# Altium PCB carrier_board.PcbDoc (part 14 of 18)
Units mm, origin at the board's own origin, x right, y up, seen from the top; angles counter-clockwise.
Board outline 146 x 102 mm, 20 copper layers (F.Cu, F.Mask, B.Cu, B.Mask, In1.Cu, F.SilkS, In2.Cu, B.SilkS, F.Adhes, B.Adhes, F.Paste, B.Paste, Dwgs.User, Cmts.User, Eco1.User, Eco2.User, Edge.Cuts, Margin, B.CrtYd, F.CrtYd); 256 components, 384 nets, 1262 pads, 1024 vias.
Unrouted connection lines stored in the file: 117.
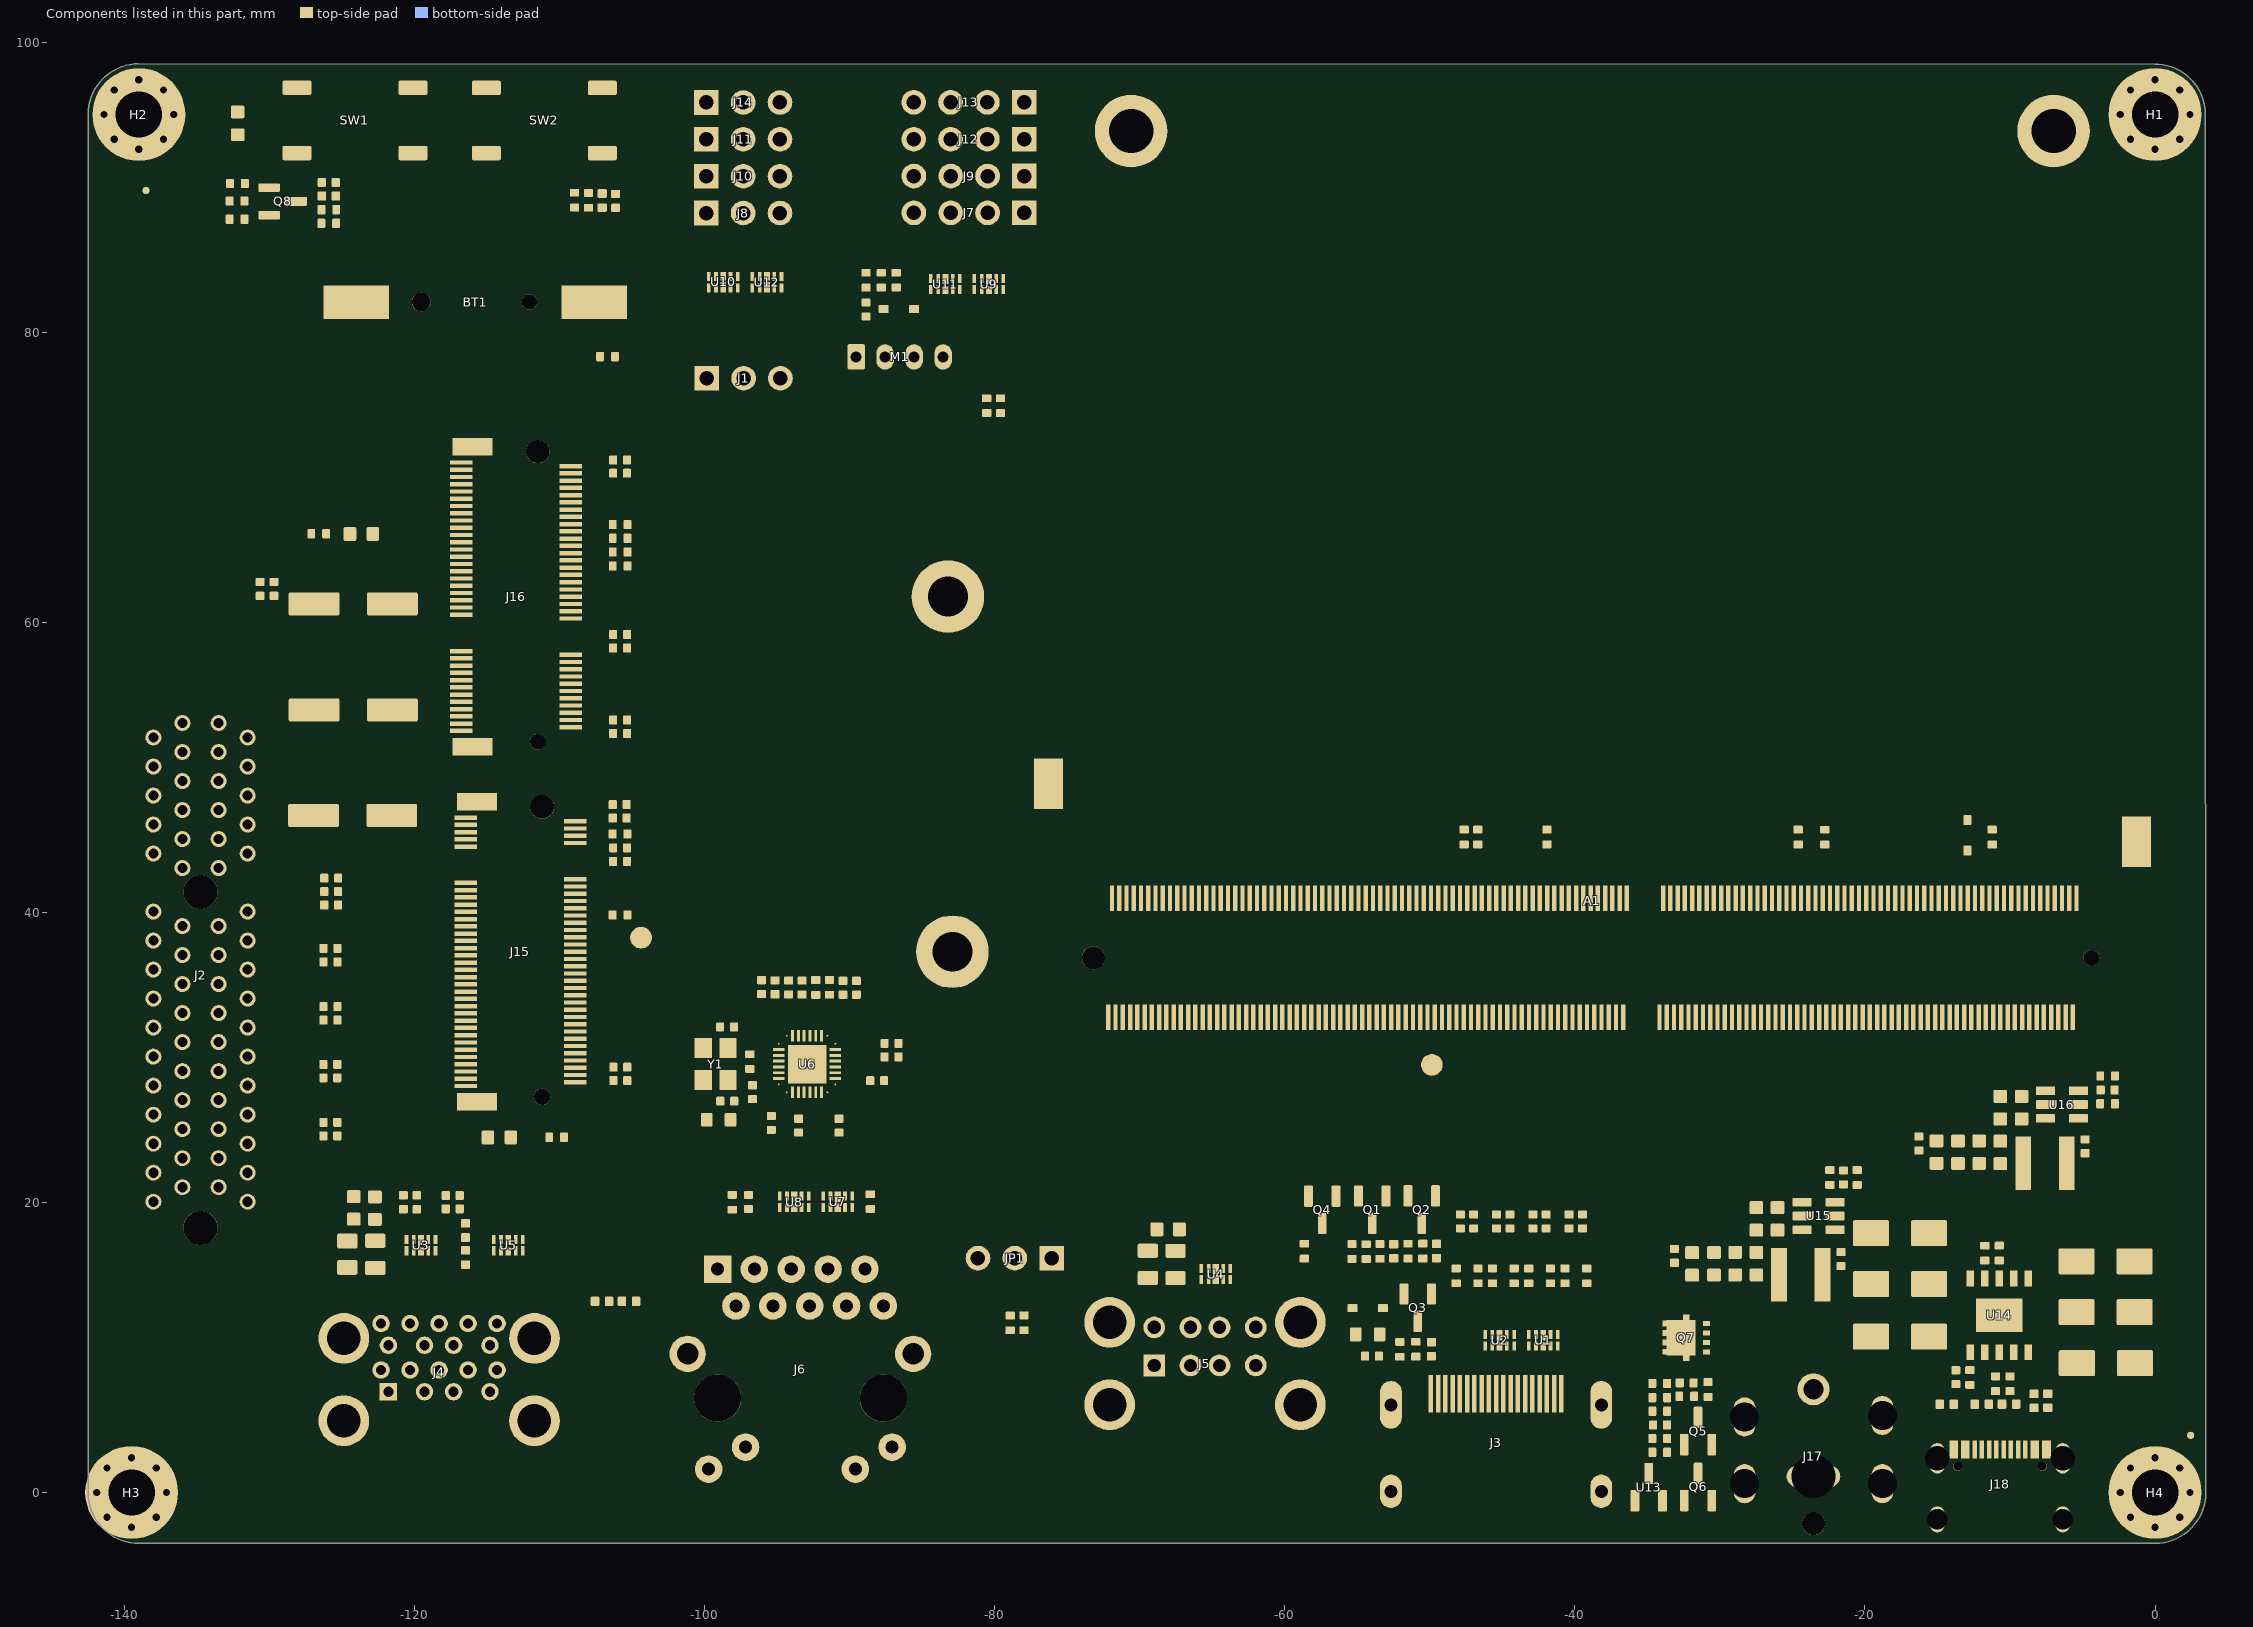
[diagram p24: the components of this part, seen from the top]

## Polygon pours and split planes (outlines as drawn) (continued)
Net-(A1-{\B\I\O\S\_\S\E\L\}\)\ on F.Cu "F.Cu-Net-(A1-~{BIOS_SEL})-1" (solid, remove dead copper, pour order 31634): -41.82,44.14 -41.814,44.21 -41.795,44.293 -41.769,44.353 -41.732,44.402 -41.699,44.427 -41.66,44.441 -41.65,44.443 -41.92,44.681 -42.19,44.443 -42.125,44.416 -42.073,44.357 -42.035,44.259 -42.02,44.14
CON_USB3_D_N on F.Cu "F.Cu-/USB2.0&USB3.0/CON_USB3_D_N-2" (solid, remove dead copper, pour order 31218): 18 vertices, not listed, extent -119.417,6.12 -118.47,7.067
TMDS_CK+ on F.Cu "F.Cu-/HDMI/TMDS_CK+-5" (solid, remove dead copper, pour order 32095): -45.793,11.322 -45.788,11.29 -45.78,11.229 -45.79,11.206 -45.815,11.197 -45.69,10.884 -45.565,11.197 -45.585,11.202 -45.596,11.215 -45.599,11.257 -45.592,11.29 -45.587,11.322
PCIE30_TX2_N on F.Cu "F.Cu-/PCIe x4/PCIE30_TX2_N-1" (solid, remove dead copper, pour order 31200): 21 vertices, not listed, extent -138.001,27.511 -136.984,28.507
CON_USB4_SSTX_P on F.Cu "F.Cu-/USB2.0&USB3.0/CON_USB4_SSTX_P-3" (solid, remove dead copper, pour order 31216): 18 vertices, not listed, extent -122.417,11.533 -121.47,12.48
I2C3_SDA on F.Cu "F.Cu-/GPIO/I2C3_SDA-1" (solid, remove dead copper, pour order 32122): -79.975,83.37 -79.975,83.355 -79.979,83.285 -79.994,83.257 -80.025,83.245 -79.9,82.932 -79.775,83.245 -79.796,83.25 -79.811,83.262 -79.825,83.307 -79.825,83.355 -79.825,83.37
Net-(J15-SUSCLK) on F.Cu "F.Cu-Net-(J15-SUSCLK)-1" (solid, remove dead copper, pour order 31426): -106.711,44.888 -106.642,44.949 -106.551,45.012 -106.473,45.052 -106.392,45.078 -106.334,45.085 -106.278,45.08 -106.339,45.401 -106.61,45.512 -106.622,45.401 -106.674,45.271 -106.768,45.126 -106.852,45.029
MDI3+ on F.Cu "F.Cu-/Gigabit Ethernet/MDI3+-1" (solid, remove dead copper, pour order 32161): -90.537,28.289 -90.627,28.269 -90.718,28.247 -90.818,28.24 -90.986,28.14 -90.585,28.155 -90.584,28.171 -90.574,28.176 -90.551,28.174 -90.537,28.173
GND on F.Cu "F.Cu-GND-121" (solid, remove dead copper, pour order 30999): 19 vertices, not listed, extent -85.581,92.466 -84.246,94.134
CON_USB4_SSTX_P on F.Cu "F.Cu-/USB2.0&USB3.0/CON_USB4_SSTX_P-2" (solid, remove dead copper, pour order 32040): -119.021,17.107 -119.021,17.102 -119.03,17.028 -119.053,16.996 -119.098,16.983 -119.05,16.669 -118.925,16.653 -118.913,16.792 -118.883,16.927 -118.861,17.024 -118.851,17.107
TMDS_D2+ on F.Cu "F.Cu-/HDMI/TMDS_D2+-3" (solid, remove dead copper, pour order 32089): -41.283,10.547 -41.278,10.515 -41.27,10.454 -41.28,10.431 -41.305,10.422 -41.18,10.109 -41.055,10.422 -41.075,10.427 -41.086,10.44 -41.089,10.482 -41.082,10.515 -41.077,10.547
I2C4_SCL on F.Cu "F.Cu-/GPIO/I2C4_SCL-2" (solid, remove dead copper, pour order 31995): -59.677,75.783 -59.722,75.835 -59.749,75.879 -59.775,75.958 -59.795,76.03 -59.844,76.121 -60.011,76.011 -60.121,75.844 -60.011,75.789 -59.958,75.775 -59.878,75.748 -59.834,75.721 -59.783,75.677
VPullup on F.Cu "F.Cu-VPullup-3" (solid, remove dead copper, pour order 31423): -11.742,46.071 -11.681,46.002 -11.618,45.911 -11.578,45.833 -11.552,45.752 -11.545,45.694 -11.55,45.638 -11.229,45.699 -11.118,45.97 -11.229,45.982 -11.359,46.034 -11.504,46.128 -11.601,46.212
SOC_UART2_TX on F.Cu "F.Cu-/GPIO/SOC_UART2_TX-1" (solid, remove dead copper, pour order 31997): -90.887,77.923 -90.932,77.975 -90.959,78.019 -90.985,78.098 -91.005,78.17 -91.054,78.261 -91.221,78.151 -91.331,77.984 -91.221,77.929 -91.168,77.915 -91.088,77.888 -91.044,77.861 -90.993,77.817
GND on F.Cu "F.Cu-GND-120" (solid, remove dead copper, pour order 31742): -115.242,45.483 -115.16,45.482 -115.102,45.472 -115.038,45.449 -114.977,45.426 -114.889,45.404 -114.849,45.6 -114.889,45.796 -115.016,45.756 -115.055,45.736 -115.132,45.701 -115.25,45.683
Net-(J5-VBUS1) on F.Cu "F.Cu-Net-(J5-VBUS1)" (solid, remove dead copper, pour order 31014): 20 vertices, not listed, extent -69.311,8.452 -67.72,10.043
Net-(Q7-G) on F.Cu "F.Cu-Net-(Q7-G)-4" (solid, remove dead copper, pour order 31553): -31.41,7.435 -31.368,7.436 -31.281,7.437 -31.187,7.43 -31.106,7.405 -31.076,7.383 -31.057,7.353 -30.819,7.612 -31.072,7.862 -31.106,7.792 -31.173,7.74 -31.275,7.704 -31.41,7.689
I2C2_SCL on F.Cu "F.Cu-/GPIO/I2C2_SCL-3" (solid, remove dead copper, pour order 32127): -82.325,82.495 -82.325,82.51 -82.321,82.58 -82.306,82.608 -82.275,82.62 -82.4,82.933 -82.525,82.62 -82.504,82.615 -82.489,82.603 -82.475,82.558 -82.475,82.51 -82.475,82.495
HSIO_1_TX+ on F.Cu "F.Cu-/LattePanda Module/HSIO_1_TX+-2" (solid, remove dead copper, pour order 31912): -80.137,20.721 -80.188,20.726 -80.225,20.739 -80.271,20.783 -80.288,20.808 -80.326,20.862 -80.389,20.917 -80.501,20.751 -80.539,20.555 -80.434,20.539 -80.36,20.537 -80.299,20.542 -80.137,20.551
GND on F.Cu "F.Cu-GND-119" (solid, remove dead copper, pour order 31597): -49.232,9.388 -49.333,9.424 -49.453,9.482 -49.524,9.53 -49.579,9.584 -49.608,9.647 -49.886,9.396 -49.656,9.111 -49.614,9.185 -49.546,9.233 -49.455,9.254 -49.373,9.247
GND on F.Cu "F.Cu-GND-118" (solid, remove dead copper, pour order 31650): -117.695,61.91 -117.669,61.912 -117.589,61.911 -117.558,61.895 -117.545,61.86 -116.769,62.01 -117.545,62.16 -117.55,62.137 -117.562,62.121 -117.607,62.107 -117.669,62.108 -117.695,62.11
CON_USB3_SSRX_P on F.Cu "F.Cu-/USB2.0&USB3.0/CON_USB3_SSRX_P-4" (solid, remove dead copper, pour order 32035): -114.501,17.882 -114.501,17.877 -114.51,17.803 -114.533,17.771 -114.578,17.758 -114.53,17.444 -114.405,17.428 -114.393,17.567 -114.363,17.702 -114.341,17.799 -114.331,17.882
GND on F.Cu "F.Cu-GND-117" (solid, remove dead copper, pour order 31873): -63.565,34.384 -63.56,34.46 -63.548,34.515 -63.52,34.581 -63.49,34.646 -63.464,34.741 -63.66,34.781 -63.856,34.741 -63.815,34.605 -63.806,34.584 -63.777,34.505 -63.765,34.384
Net-(J15-DEVSLP) on F.Cu "F.Cu-Net-(J15-DEVSLP)" (solid, remove dead copper, pour order 31661): -107.995,37.38 -108.021,37.378 -108.101,37.379 -108.132,37.395 -108.145,37.43 -108.921,37.28 -108.145,37.13 -108.14,37.153 -108.128,37.169 -108.083,37.183 -108.021,37.182 -107.995,37.18
Net-(J6-PadL1) on F.Cu "F.Cu-Net-(J6-PadL1)" (solid, remove dead copper, pour order 31017): 25 vertices, not listed, extent -87.25,2.945 -85.982,4.213
GND on F.Cu "F.Cu-GND-116" (solid, remove dead copper, pour order 31782): -20.315,41.994 -20.31,42.075 -20.298,42.132 -20.274,42.194 -20.248,42.258 -20.224,42.351 -20.42,42.391 -20.616,42.351 -20.576,42.223 -20.56,42.191 -20.529,42.113 -20.515,41.994
GND on F.Cu "F.Cu-GND-115" (solid, remove dead copper, pour order 31688): -64.95,15.168 -64.937,15.103 -64.923,15.048 -64.918,14.996 -64.932,14.958 -64.949,14.946 -64.975,14.942 -64.75,14.654 -64.525,14.942 -64.553,14.947 -64.571,14.96 -64.582,15.003 -64.563,15.103 -64.55,15.168
{\P\L\T\_\R\S\T\}\ on F.Cu "F.Cu-/~{PLT_RST}-6" (solid, remove dead copper, pour order 32148): -92.41,31.99 -92.407,31.958 -92.405,31.89 -92.414,31.861 -92.435,31.84 -92.335,31.489 -92.235,31.84 -92.261,31.872 -92.265,31.932 -92.263,31.958 -92.26,31.99
GND on F.Cu "F.Cu-GND-114" (solid, remove dead copper, pour order 31724): -49.66,15.946 -49.665,15.85 -49.677,15.784 -49.692,15.735 -49.731,15.589 -49.535,15.549 -49.339,15.589 -49.378,15.735 -49.401,15.82 -49.41,15.946
GND on F.Cu "F.Cu-GND-113" (solid, remove dead copper, pour order 31432): 42 vertices, not listed, extent -81.339,92.8 -80.011,93.8
HSIO_0_TX+ on F.Cu "F.Cu-/LattePanda Module/HSIO_0_TX+" (solid, remove dead copper, pour order 31950): -119.293,21.971 -119.131,21.962 -119.032,21.956 -118.891,21.975 -118.929,22.171 -119.041,22.337 -119.113,22.271 -119.142,22.228 -119.166,22.194 -119.194,22.166 -119.234,22.148 -119.293,22.141
GND on F.Cu "F.Cu-GND-112" (solid, remove dead copper, pour order 31662): -117.395,37.43 -117.369,37.432 -117.289,37.431 -117.258,37.415 -117.245,37.38 -116.469,37.53 -117.245,37.68 -117.25,37.657 -117.262,37.641 -117.307,37.627 -117.369,37.628 -117.395,37.63
+3V3 on F.Cu "F.Cu-+3V3-52" (solid, remove dead copper, pour order 31298): -106.638,45.91 -106.578,45.977 -106.509,46.056 -106.429,46.13 -106.341,46.181 -106.293,46.192 -106.244,46.19 -106.329,46.501 -106.61,46.616 -106.621,46.528 -106.671,46.435 -106.766,46.33 -106.848,46.257 -106.92,46.192
Net-(D22-A) on F.Cu "F.Cu-Net-(D22-A)" (solid, remove dead copper, pour order 31246): 17 vertices, not listed, extent -133.102,94.757 -132.189,95.598
TMDS_D2- on F.Cu "F.Cu-/HDMI/TMDS_D2--4" (solid, remove dead copper, pour order 32082): -41.577,10.448 -41.582,10.48 -41.59,10.541 -41.58,10.564 -41.555,10.572 -41.68,10.886 -41.805,10.572 -41.785,10.568 -41.774,10.555 -41.771,10.513 -41.778,10.48 -41.783,10.448
GND on F.Cu "F.Cu-GND-111" (solid, remove dead copper, pour order 31689): -64.55,14.142 -64.563,14.207 -64.577,14.262 -64.582,14.314 -64.568,14.352 -64.551,14.364 -64.525,14.367 -64.75,14.656 -64.975,14.367 -64.947,14.363 -64.929,14.35 -64.918,14.307 -64.937,14.207 -64.95,14.142
Net-(Q4-G) on F.Cu "F.Cu-Net-(Q4-G)-1" (solid, remove dead copper, pour order 31559): -56.933,20.213 -56.906,20.225 -56.873,20.227 -56.842,20.219 -56.813,20.198 -56.793,20.169 -56.777,20.127 -56.768,20.039 -56.467,20.438 -56.768,20.664 -56.786,20.602 -56.849,20.523 -56.973,20.422 -57.066,20.36 -57.074,20.354
Net-(J3-+5V) on F.Cu "F.Cu-Net-(J3-+5V)-1" (solid, remove dead copper, pour order 31224): -54.355,10.38 -54.382,10.406 -54.497,10.525 -54.613,10.674 -54.661,10.758 -54.696,10.848 -54.714,10.943 -54.71,11.043 -55.111,10.901 -55.238,10.425 -55.145,10.415 -55.046,10.366 -54.933,10.269 -54.804,10.122 -54.715,10.02
Net-(Q4-D) on F.Cu "F.Cu-Net-(Q4-D)-4" (solid, remove dead copper, pour order 31628): -48.288,15.99 -48.294,15.917 -48.314,15.83 -48.34,15.772 -48.377,15.725 -48.409,15.701 -48.449,15.688 -48.455,15.687 -48.185,15.449 -47.915,15.687 -47.98,15.713 -48.031,15.773 -48.067,15.871 -48.082,15.99
TMDS_D1- on F.Cu "F.Cu-/HDMI/TMDS_D1--4" (solid, remove dead copper, pour order 31434): -42.853,14.958 -42.962,14.859 -43.106,14.76 -43.182,14.725 -43.258,14.704 -43.306,14.7 -43.186,14.429 -42.865,14.383 -42.877,14.475 -42.854,14.583 -42.792,14.706 -42.707,14.812
SOC_UART1_RX on F.Cu "F.Cu-/GPIO/SOC_UART1_RX-3" (solid, remove dead copper, pour order 32120): -99.285,83.493 -99.285,83.477 -99.289,83.407 -99.304,83.379 -99.335,83.367 -99.21,83.054 -99.085,83.367 -99.106,83.372 -99.121,83.385 -99.135,83.43 -99.135,83.477 -99.135,83.493
+3V3 on F.Cu "F.Cu-+3V3-51" (solid, remove dead copper, pour order 31401): -89.101,28.766 -89.035,28.692 -88.966,28.596 -88.916,28.508 -88.879,28.414 -88.863,28.345 -88.86,28.276 -88.86,28.273 -88.579,28.389 -88.495,28.7 -88.595,28.7 -88.715,28.738 -88.851,28.817 -88.96,28.907
Net-(U6-CKXTAL2) on F.Cu "F.Cu-Net-(U6-CKXTAL2)-3" (solid, remove dead copper, pour order 31690): -97.463,28.955 -97.38,28.957 -97.199,28.96 -97.119,28.951 -97.065,28.93 -96.879,29.2 -97.186,29.392 -97.206,29.294 -97.26,29.208 -97.345,29.141 -97.395,29.118 -97.442,29.106 -97.463,29.105
VDC on F.Cu "F.Cu-VDC-2" (solid, remove dead copper, pour order 30960): 20 vertices, not listed, extent -16.76,5.64 3.3,41.835
Net-(JP1-C) on F.Cu "F.Cu-Net-(JP1-C)-1" (solid, remove dead copper, pour order 31639): -79.03,12.75 -79.036,12.68 -79.055,12.597 -79.081,12.537 -79.118,12.488 -79.151,12.463 -79.19,12.449 -79.2,12.447 -78.93,12.209 -78.66,12.447 -78.725,12.474 -78.777,12.533 -78.815,12.631 -78.83,12.75
+3V3 on F.Cu "F.Cu-+3V3-50" (solid, remove dead copper, pour order 31416): -106.757,52.635 -106.711,52.588 -106.666,52.527 -106.628,52.458 -106.598,52.379 -106.583,52.307 -106.579,52.231 -106.58,52.21 -106.299,52.33 -106.22,52.64 -106.314,52.642 -106.441,52.682 -106.603,52.771 -106.757,52.885
+5V on F.Cu "F.Cu-+5V-9" (solid, remove dead copper, pour order 31304): -87.342,82.191 -87.411,82.114 -87.485,82.028 -87.571,81.947 -87.667,81.887 -87.719,81.87 -87.774,81.865 -87.661,81.589 -87.31,81.551 -87.312,81.624 -87.277,81.701 -87.197,81.789 -87.124,81.852 -87.059,81.908
GND on F.Cu "F.Cu-GND-110" (solid, remove dead copper, pour order 31848): -95.975,35.364 -95.97,35.442 -95.958,35.498 -95.932,35.563 -95.904,35.627 -95.879,35.721 -96.075,35.761 -96.271,35.721 -96.23,35.589 -96.218,35.563 -96.188,35.484 -96.175,35.364
GND on F.Cu "F.Cu-GND-109" (solid, remove dead copper, pour order 32015): 19 vertices, not listed, extent -49.718,15.062 -49.336,15.549
{\P\L\T\_\R\S\T\}\ on F.Cu "F.Cu-/~{PLT_RST}-5" (solid, remove dead copper, pour order 31686): -110.145,65.16 -110.119,65.162 -110.039,65.161 -110.008,65.145 -109.995,65.11 -109.219,65.26 -109.995,65.41 -110,65.387 -110.012,65.371 -110.057,65.357 -110.119,65.358 -110.145,65.36
CC1 on F.Cu "F.Cu-/PSU/CC1-3" (solid, remove dead copper, pour order 31720): -12.04,3.725 -12.038,3.699 -12.039,3.619 -12.055,3.588 -12.09,3.575 -11.94,2.954 -11.79,3.575 -11.813,3.58 -11.829,3.592 -11.843,3.637 -11.842,3.699 -11.84,3.725
+3V3 on F.Cu "F.Cu-+3V3-49" (solid, remove dead copper, pour order 31568): -109.79,25.08 -109.796,24.995 -109.817,24.894 -109.843,24.829 -109.881,24.773 -109.912,24.745 -109.95,24.727 -109.69,24.489 -109.43,24.727 -109.492,24.766 -109.542,24.841 -109.578,24.957 -109.59,25.08
PCIE30_TX3_N on F.Cu "F.Cu-/PCIe x4/PCIE30_TX3_N" (solid, remove dead copper, pour order 31202): 20 vertices, not listed, extent -138.001,23.511 -136.993,24.507
I2C3_SCL on F.Cu "F.Cu-/GPIO/I2C3_SCL-4" (solid, remove dead copper, pour order 32139): -82.975,84.145 -82.975,84.13 -82.979,84.06 -82.994,84.032 -83.025,84.02 -82.9,83.707 -82.775,84.02 -82.796,84.025 -82.811,84.037 -82.825,84.082 -82.825,84.13 -82.825,84.145
+3V3 on F.Cu "F.Cu-+3V3-48" (solid, remove dead copper, pour order 31841): -131.58,90.694 -131.575,90.772 -131.563,90.828 -131.537,90.893 -131.509,90.957 -131.484,91.051 -131.68,91.091 -131.876,91.051 -131.835,90.919 -131.823,90.893 -131.793,90.814 -131.78,90.694
+3V3 on F.Cu "F.Cu-+3V3-47" (solid, remove dead copper, pour order 31372): -106.5,52.92 -106.495,52.84 -106.488,52.744 -106.492,52.646 -106.518,52.56 -106.544,52.526 -106.58,52.5 -106.3,52.329 -106.02,52.5 -106.074,52.547 -106.104,52.623 -106.112,52.738 -106.105,52.84 -106.1,52.92
GND on F.Cu "F.Cu-GND-108" (solid, remove dead copper, pour order 31853): -117.934,34.63 -118.012,34.635 -118.068,34.647 -118.133,34.673 -118.197,34.701 -118.291,34.726 -118.331,34.53 -118.291,34.334 -118.159,34.375 -118.133,34.387 -118.054,34.417 -117.934,34.43
GND on F.Cu "F.Cu-GND-107" (solid, remove dead copper, pour order 31772): -55.515,39.666 -55.52,39.585 -55.532,39.528 -55.556,39.466 -55.582,39.402 -55.606,39.309 -55.41,39.269 -55.214,39.309 -55.254,39.437 -55.27,39.469 -55.301,39.547 -55.315,39.666
PWR_EN on F.Cu "F.Cu-/PSU/PWR_EN-5" (solid, remove dead copper, pour order 31575): -78.57,11.09 -78.485,11.084 -78.384,11.063 -78.319,11.037 -78.263,10.999 -78.235,10.968 -78.217,10.93 -77.979,11.19 -78.217,11.45 -78.256,11.388 -78.331,11.338 -78.447,11.302 -78.57,11.29
CC1 on F.Cu "F.Cu-/PSU/CC1-2" (solid, remove dead copper, pour order 31849): -9.64,15.404 -9.635,15.482 -9.623,15.538 -9.597,15.603 -9.569,15.667 -9.544,15.761 -9.74,15.801 -9.936,15.761 -9.895,15.629 -9.883,15.603 -9.853,15.524 -9.84,15.404
TMDS_D1+ on F.Cu "F.Cu-/HDMI/TMDS_D1+-4" (solid, remove dead copper, pour order 32091): -42.783,10.547 -42.778,10.515 -42.77,10.454 -42.78,10.431 -42.805,10.422 -42.68,10.109 -42.555,10.422 -42.575,10.427 -42.586,10.44 -42.589,10.482 -42.582,10.515 -42.577,10.547
GND on F.Cu "F.Cu-GND-106" (solid, remove dead copper, pour order 30993): 19 vertices, not listed, extent -86.914,92.466 -85.579,94.134
{\P\W\R\_\L\E\D\}\{\s\l\a\s\h\}\{PSON} on F.Cu "F.Cu-/~{PWR_LED}{slash}~{PSON}-2" (solid, remove dead copper, pour order 31889): -58.75,15.946 -58.755,15.859 -58.767,15.798 -58.787,15.741 -58.831,15.589 -58.635,15.549 -58.439,15.589 -58.478,15.711 -58.5,15.751 -58.535,15.828 -58.55,15.946
CC1 on F.Cu "F.Cu-/PSU/CC1-1" (solid, remove dead copper, pour order 31870): -13.666,5.99 -13.588,5.985 -13.532,5.973 -13.467,5.947 -13.403,5.919 -13.309,5.894 -13.269,6.09 -13.309,6.286 -13.441,6.245 -13.467,6.233 -13.546,6.203 -13.666,6.19
{\C\L\K\R\E\Q\E\}\ on F.Cu "F.Cu-/M.2 E&M Key/~{CLKREQE}-2" (solid, remove dead copper, pour order 31812): -115.476,65.41 -115.398,65.405 -115.342,65.393 -115.277,65.367 -115.213,65.339 -115.119,65.314 -115.079,65.51 -115.119,65.706 -115.251,65.665 -115.277,65.653 -115.356,65.623 -115.476,65.61
Net-(D21-A2) on F.Cu "F.Cu-Net-(D21-A2)-3" (solid, remove dead copper, pour order 31607): -126.345,89.72 -126.325,89.837 -126.298,89.908 -126.259,89.976 -126.219,90.024 -126.171,90.062 -126.12,90.084 -126.387,90.311 -126.657,90.086 -126.599,90.046 -126.547,89.965 -126.508,89.837 -126.495,89.72
GND on F.Cu "F.Cu-GND-105" (solid, remove dead copper, pour order 31778): -51.565,33.794 -51.56,33.875 -51.548,33.932 -51.524,33.994 -51.498,34.058 -51.474,34.151 -51.67,34.191 -51.866,34.151 -51.826,34.023 -51.81,33.991 -51.779,33.913 -51.765,33.794
I2C4_SCL on F.Cu "F.Cu-/GPIO/I2C4_SCL-1" (solid, remove dead copper, pour order 31982): -83.975,82.456 -83.98,82.388 -83.992,82.337 -84.03,82.263 -84.066,82.198 -84.096,82.099 -83.9,82.059 -83.704,82.099 -83.743,82.215 -83.77,82.263 -83.809,82.338 -83.821,82.389 -83.825,82.456
MDI1+ on F.Cu "F.Cu-/Gigabit Ethernet/MDI1+" (solid, remove dead copper, pour order 31029): 24 vertices, not listed, extent -96.085,12.859 -94.505,14.292
GND on F.Cu "F.Cu-GND-104" (solid, remove dead copper, pour order 31336): -48.83,5.355 -48.832,5.381 -48.831,5.461 -48.815,5.492 -48.78,5.505 -48.93,6.806 -49.08,5.505 -49.057,5.5 -49.041,5.488 -49.027,5.443 -49.028,5.381 -49.03,5.355
+3V3 on F.Cu "F.Cu-+3V3-46" (solid, remove dead copper, pour order 31692): -55.26,15.59 -55.254,15.655 -55.235,15.732 -55.209,15.787 -55.172,15.833 -55.138,15.856 -55.097,15.869 -55.09,15.87 -55.36,16.108 -55.63,15.87 -55.562,15.844 -55.51,15.785 -55.473,15.691 -55.46,15.59
GND on F.Cu "F.Cu-GND-103" (solid, remove dead copper, pour order 31392): -96.495,26.56 -96.5,26.626 -96.507,26.709 -96.504,26.791 -96.477,26.86 -96.451,26.883 -96.415,26.897 -96.695,27.121 -96.975,26.897 -96.943,26.886 -96.92,26.867 -96.89,26.81 -96.883,26.716 -96.89,26.626 -96.895,26.56
+3V3 on F.Cu "F.Cu-+3V3-45" (solid, remove dead copper, pour order 31476): -106.425,70.86 -106.438,70.694 -106.464,70.603 -106.511,70.53 -106.569,70.494 -106.3,70.269 -106.031,70.494 -106.091,70.532 -106.136,70.605 -106.166,70.718 -106.175,70.86
HSIO_2_RX+ on F.Cu "F.Cu-/LattePanda Module/HSIO_2_RX+" (solid, remove dead copper, pour order 31965): -98.387,42.729 -98.549,42.738 -98.648,42.744 -98.789,42.725 -98.751,42.529 -98.639,42.363 -98.567,42.429 -98.538,42.472 -98.514,42.506 -98.486,42.534 -98.446,42.552 -98.387,42.559
SOC_UART0_RX on F.Cu "F.Cu-/GPIO/SOC_UART0_RX-2" (solid, remove dead copper, pour order 32131): -99.785,83.493 -99.785,83.477 -99.789,83.407 -99.804,83.379 -99.835,83.367 -99.71,83.054 -99.585,83.367 -99.606,83.372 -99.621,83.385 -99.635,83.43 -99.635,83.477 -99.635,83.493
GND on F.Cu "F.Cu-GND-102" (solid, remove dead copper, pour order 31711): -83.25,84.684 -83.245,84.861 -83.216,85.029 -83.214,85.041 -83.41,85.081 -83.606,85.041 -83.577,84.915 -83.557,84.82 -83.55,84.684
+3V3 on F.Cu "F.Cu-+3V3-44" (solid, remove dead copper, pour order 31475): -106.175,70.6 -106.162,70.766 -106.136,70.857 -106.089,70.93 -106.031,70.966 -106.3,71.191 -106.569,70.966 -106.509,70.928 -106.464,70.855 -106.434,70.742 -106.425,70.6
GbE_PCIe_CLK- on F.Cu "F.Cu-/Gigabit Ethernet/GbE_PCIe_CLK--1" (solid, remove dead copper, pour order 31938): -48.662,42.865 -48.695,42.904 -48.711,42.94 -48.713,43.003 -48.707,43.033 -48.696,43.098 -48.702,43.181 -48.898,43.143 -49.064,43.031 -49.001,42.946 -48.95,42.892 -48.904,42.853 -48.783,42.745
GND on F.Cu "F.Cu-GND-101" (solid, remove dead copper, pour order 31792): -44.815,41.994 -44.81,42.075 -44.798,42.132 -44.774,42.194 -44.748,42.258 -44.724,42.351 -44.92,42.391 -45.116,42.351 -45.076,42.223 -45.06,42.191 -45.029,42.113 -45.015,41.994
PCIE30_TX1_P on F.Cu "F.Cu-/PCIe x4/PCIE30_TX1_P-1" (solid, remove dead copper, pour order 31529): -126.773,33.086 -126.591,33.15 -126.482,33.178 -126.373,33.196 -126.298,33.199 -126.232,33.19 -126.269,33.5 -126.55,33.651 -126.563,33.528 -126.611,33.41 -126.691,33.311 -126.773,33.256
GND on F.Cu "F.Cu-GND-100" (solid, remove dead copper, pour order 31794): -30.815,41.994 -30.81,42.075 -30.798,42.132 -30.774,42.194 -30.748,42.258 -30.724,42.351 -30.92,42.391 -31.116,42.351 -31.076,42.223 -31.06,42.191 -31.029,42.113 -31.015,41.994
DDC_SCL on F.Cu "F.Cu-/HDMI/DDC_SCL-3" (solid, remove dead copper, pour order 31413): -48.939,16.9 -48.964,16.925 -49.126,17.1 -49.193,17.199 -49.212,17.247 -49.22,17.293 -49.539,17.137 -49.617,16.841 -49.499,16.879 -49.368,16.882 -49.231,16.85 -49.111,16.786 -49.08,16.759
TMDS_CK+ on F.Cu "F.Cu-/HDMI/TMDS_CK+-4" (solid, remove dead copper, pour order 31437): -47.017,13.902 -46.908,14.001 -46.764,14.1 -46.688,14.135 -46.612,14.156 -46.564,14.16 -46.684,14.431 -47.005,14.477 -46.993,14.385 -47.016,14.277 -47.078,14.154 -47.163,14.048
CON_USB1_D_N on F.Cu "F.Cu-/USB2.0&USB3.0/CON_USB1_D_N-1" (solid, remove dead copper, pour order 32041): -64.221,15.893 -64.221,15.887 -64.23,15.813 -64.253,15.781 -64.298,15.767 -64.25,15.454 -64.125,15.438 -64.113,15.577 -64.083,15.712 -64.061,15.809 -64.051,15.893
DDI_B_TX2- on F.Cu "F.Cu-/HDMI/DDI_B_TX2-" (solid, remove dead copper, pour order 31465): -45.198,19.683 -45.245,19.595 -45.286,19.55 -45.338,19.51 -45.394,19.48 -45.458,19.459 -45.56,19.45 -45.402,19.169 -45.092,19.142 -45.1,19.243 -45.076,19.399 -45.015,19.612 -44.993,19.683
CON_USB4_SSRX_N on F.Cu "F.Cu-/USB2.0&USB3.0/CON_USB4_SSRX_N-4" (solid, remove dead copper, pour order 32059): -112.729,17.882 -112.713,17.769 -112.697,17.702 -112.667,17.567 -112.655,17.428 -112.53,17.444 -112.482,17.758 -112.511,17.762 -112.532,17.775 -112.554,17.817 -112.559,17.877 -112.559,17.882
GbE_PCIe_RX+ on F.Cu "F.Cu-/Gigabit Ethernet/GbE_PCIe_RX+" (solid, remove dead copper, pour order 31955): -80.339,44.983 -80.348,44.821 -80.354,44.722 -80.335,44.581 -80.139,44.619 -79.973,44.731 -80.039,44.803 -80.082,44.832 -80.116,44.856 -80.144,44.884 -80.162,44.924 -80.169,44.983
HSIO_3_RX- on F.Cu "F.Cu-/LattePanda Module/HSIO_3_RX--2" (solid, remove dead copper, pour order 31949): -77.203,56.411 -77.041,56.402 -76.942,56.396 -76.801,56.415 -76.839,56.611 -76.951,56.777 -77.023,56.711 -77.052,56.668 -77.076,56.634 -77.104,56.606 -77.144,56.588 -77.203,56.581
MDI2+ on F.Cu "F.Cu-/Gigabit Ethernet/MDI2+" (solid, remove dead copper, pour order 31032): 24 vertices, not listed, extent -93.545,12.859 -91.965,14.292
TMDS_D0+ on F.Cu "F.Cu-/HDMI/TMDS_D0+-5" (solid, remove dead copper, pour order 32088): -44.293,10.547 -44.288,10.515 -44.28,10.454 -44.29,10.431 -44.315,10.422 -44.19,10.109 -44.065,10.422 -44.085,10.427 -44.096,10.44 -44.099,10.482 -44.092,10.515 -44.087,10.547
Net-(A1-SIO_UART_TX) on F.Cu "F.Cu-Net-(A1-SIO_UART_TX)" (solid, remove dead copper, pour order 31854): -72.864,44.67 -72.942,44.675 -72.998,44.687 -73.063,44.713 -73.127,44.741 -73.221,44.766 -73.261,44.57 -73.221,44.374 -73.089,44.415 -73.063,44.427 -72.984,44.457 -72.864,44.47
CON_USB4_SSTX_N on F.Cu "F.Cu-/USB2.0&USB3.0/CON_USB4_SSTX_N-2" (solid, remove dead copper, pour order 31535): -118.345,19.799 -118.263,19.747 -118.22,19.702 -118.181,19.646 -118.151,19.585 -118.13,19.516 -118.12,19.407 -117.839,19.56 -117.804,19.87 -117.911,19.861 -118.071,19.884 -118.284,19.947 -118.345,19.969
Net-(D11-A2) on F.Cu "F.Cu-Net-(D11-A2)" (solid, remove dead copper, pour order 31428): -10.455,5.475 -10.45,5.552 -10.431,5.643 -10.405,5.72 -10.367,5.788 -10.332,5.826 -10.29,5.854 -10.271,5.861 -10.555,6.091 -10.839,5.861 -10.772,5.821 -10.716,5.743 -10.674,5.624 -10.655,5.475
GND on F.Cu "F.Cu-GND-99" (solid, remove dead copper, pour order 31430): 42 vertices, not listed, extent -95.639,92.79 -94.311,93.79
GND on F.Cu "F.Cu-GND-98" (solid, remove dead copper, pour order 31883): -100.704,29.096 -100.75,29.148 -100.778,29.193 -100.804,29.27 -100.825,29.341 -100.874,29.431 -101.041,29.321 -101.151,29.154 -101.017,29.078 -100.941,29.036 -100.846,28.954
Net-(Q5-G) on F.Cu "F.Cu-Net-(Q5-G)-2" (solid, remove dead copper, pour order 31286): -32.762,4.162 -32.698,4.071 -32.657,3.943 -32.646,3.772 -32.673,3.559 -32.746,3.308 -32.76,3.272 -32.459,3.302 -32.317,4.04 -32.358,4.058 -32.426,4.132 -32.492,4.224 -32.582,4.342
Net-(Q5-S) on F.Cu "F.Cu-Net-(Q5-S)-1" (solid, remove dead copper, pour order 31288): -30.493,2.196 -30.471,2.345 -30.442,2.44 -30.402,2.529 -30.364,2.587 -30.319,2.632 -30.271,2.658 -30.559,3.303 -30.816,2.609 -30.746,2.579 -30.688,2.514 -30.646,2.417 -30.634,2.337
GND on F.Cu "F.Cu-GND-97" (solid, remove dead copper, pour order 31677): -117.395,28.43 -117.369,28.432 -117.289,28.431 -117.258,28.415 -117.245,28.38 -116.469,28.53 -117.245,28.68 -117.25,28.657 -117.262,28.641 -117.307,28.627 -117.369,28.628 -117.395,28.63
GND on F.Cu "F.Cu-GND-96" (solid, remove dead copper, pour order 31671): -115.845,63.61 -115.871,63.608 -115.951,63.609 -115.982,63.625 -115.995,63.66 -116.771,63.51 -115.995,63.36 -115.99,63.383 -115.978,63.399 -115.933,63.413 -115.871,63.412 -115.845,63.41
GND on F.Cu "F.Cu-GND-95" (solid, remove dead copper, pour order 31140): 19 vertices, not listed, extent -101.109,28.17 -99.969,29.359
GND on F.Cu "F.Cu-GND-94" (solid, remove dead copper, pour order 31164): 19 vertices, not listed, extent -116.489,51.409 -115.266,52.51
+12V on F.Cu "F.Cu-+12V-3" (solid, remove dead copper, pour order 31590): -33.33,7.462 -33.259,7.457 -33.175,7.438 -33.108,7.412 -33.049,7.375 -33.018,7.341 -32.997,7.3 -32.993,7.283 -32.769,7.562 -32.993,7.842 -33.025,7.776 -33.092,7.721 -33.198,7.68 -33.33,7.662
+1V0 on F.Cu "F.Cu-+1V0-8" (solid, remove dead copper, pour order 31696): -90.949,26.2 -90.932,26.164 -90.922,26.117 -90.924,26.074 -90.939,26.031 -90.962,26.003 -90.996,25.979 -91.034,25.964 -90.734,25.769 -90.521,26.041 -90.58,26.062 -90.656,26.129 -90.753,26.257 -90.791,26.315 -90.808,26.341
Net-(A1-{\B\I\O\S\_\S\E\L\}\)\ on F.Cu "F.Cu-Net-(A1-~{BIOS_SEL})" (solid, remove dead copper, pour order 31808): -42.02,43.266 -42.025,43.188 -42.037,43.132 -42.063,43.067 -42.091,43.003 -42.116,42.909 -41.92,42.869 -41.724,42.909 -41.765,43.041 -41.777,43.067 -41.807,43.146 -41.82,43.266
GND on F.Cu "F.Cu-GND-93" (solid, remove dead copper, pour order 31877): -60.324,34.154 -60.268,34.204 -60.221,34.234 -60.152,34.26 -60.086,34.285 -59.999,34.334 -60.109,34.501 -60.276,34.611 -60.344,34.485 -60.352,34.466 -60.388,34.39 -60.466,34.296
TMDS_D0- on F.Cu "F.Cu-/HDMI/TMDS_D0--5" (solid, remove dead copper, pour order 31320): -45.033,8.255 -45.031,8.227 -45.031,8.148 -45.046,8.117 -45.08,8.105 -44.93,6.804 -44.78,8.105 -44.803,8.11 -44.819,8.122 -44.832,8.167 -44.829,8.227 -44.827,8.255
+3V3 on F.Cu "F.Cu-+3V3-43" (solid, remove dead copper, pour order 31622): -108.295,53.385 -108.335,53.378 -108.408,53.369 -108.434,53.38 -108.445,53.41 -109.221,53.26 -108.445,53.11 -108.44,53.132 -108.428,53.145 -108.385,53.151 -108.335,53.142 -108.295,53.135
SUSCLK_WIFI on F.Cu "F.Cu-/LattePanda Module/SUSCLK_WIFI-6" (solid, remove dead copper, pour order 31855): -74.054,48.71 -74.132,48.715 -74.188,48.727 -74.253,48.753 -74.317,48.781 -74.411,48.806 -74.451,48.61 -74.411,48.414 -74.279,48.455 -74.253,48.467 -74.174,48.497 -74.054,48.51
I2C5_SCL on F.Cu "F.Cu-/GPIO/I2C5_SCL-1" (solid, remove dead copper, pour order 32147): -84.325,83.27 -84.325,83.285 -84.321,83.355 -84.306,83.383 -84.275,83.395 -84.4,83.708 -84.525,83.395 -84.504,83.39 -84.489,83.378 -84.475,83.333 -84.475,83.285 -84.475,83.27
GND on F.Cu "F.Cu-GND-92" (solid, remove dead copper, pour order 31655): -117.395,32.93 -117.369,32.932 -117.289,32.931 -117.258,32.915 -117.245,32.88 -116.469,33.03 -117.245,33.18 -117.25,33.157 -117.262,33.141 -117.307,33.127 -117.369,33.128 -117.395,33.13
Net-(J4A-VBUS1) on F.Cu "F.Cu-Net-(J4A-VBUS1)" (solid, remove dead copper, pour order 31098): 19 vertices, not listed, extent -122.4,5.85 -121.2,6.951
+3V3 on F.Cu "F.Cu-+3V3-42" (solid, remove dead copper, pour order 31743): -49.71,18.716 -49.715,18.633 -49.727,18.573 -49.749,18.514 -49.773,18.45 -49.796,18.359 -49.6,18.319 -49.404,18.359 -49.444,18.484 -49.462,18.52 -49.496,18.597 -49.51,18.716
GND on F.Cu "F.Cu-GND-91" (solid, remove dead copper, pour order 31887): -65.815,42.274 -65.81,42.361 -65.798,42.422 -65.778,42.479 -65.734,42.631 -65.93,42.671 -66.126,42.631 -66.087,42.509 -66.065,42.469 -66.03,42.392 -66.015,42.274
HSIO_9_RX+ on F.Cu "F.Cu-/LattePanda Module/HSIO_9_RX+" (solid, remove dead copper, pour order 31923): -60.886,36.753 -60.891,36.702 -60.904,36.665 -60.948,36.619 -60.973,36.602 -61.027,36.564 -61.082,36.501 -60.916,36.389 -60.72,36.351 -60.704,36.456 -60.702,36.53 -60.707,36.591 -60.716,36.753
Net-(D25-A2) on F.Cu "F.Cu-Net-(D25-A2)-2" (solid, remove dead copper, pour order 31185): 18 vertices, not listed, extent -108.043,91.416 -106.843,92.341
GND on F.Cu "F.Cu-GND-90" (solid, remove dead copper, pour order 31834): -43.03,4.766 -43.035,4.688 -43.047,4.632 -43.073,4.567 -43.101,4.503 -43.126,4.409 -42.93,4.369 -42.734,4.409 -42.775,4.541 -42.787,4.567 -42.817,4.646 -42.83,4.766
GND on F.Cu "F.Cu-GND-89" (solid, remove dead copper, pour order 31679): -115.845,66.61 -115.871,66.608 -115.951,66.609 -115.982,66.625 -115.995,66.66 -116.771,66.51 -115.995,66.36 -115.99,66.383 -115.978,66.399 -115.933,66.413 -115.871,66.412 -115.845,66.41
HSIO_1_TX+ on F.Cu "F.Cu-/LattePanda Module/HSIO_1_TX+-1" (solid, remove dead copper, pour order 31946): -115.793,20.071 -115.631,20.062 -115.532,20.056 -115.391,20.075 -115.429,20.271 -115.541,20.437 -115.613,20.371 -115.642,20.328 -115.666,20.294 -115.694,20.266 -115.734,20.248 -115.793,20.241
Net-(BT1-+) on F.Cu "F.Cu-Net-(BT1-+)-1" (solid, remove dead copper, pour order 30989): 22 vertices, not listed, extent -124.011,80.656 -121.336,82.071
+3V3 on F.Cu "F.Cu-+3V3-41" (solid, remove dead copper, pour order 31586): -131.78,90.83 -131.786,90.752 -131.805,90.659 -131.832,90.591 -131.869,90.532 -131.903,90.5 -131.944,90.478 -131.95,90.477 -131.69,90.239 -131.43,90.477 -131.49,90.516 -131.537,90.591 -131.57,90.709 -131.58,90.83
GND on F.Cu "F.Cu-GND-88" (solid, remove dead copper, pour order 31826): -46.03,4.766 -46.035,4.688 -46.047,4.632 -46.073,4.567 -46.101,4.503 -46.126,4.409 -45.93,4.369 -45.734,4.409 -45.775,4.541 -45.787,4.567 -45.817,4.646 -45.83,4.766
GND on F.Cu "F.Cu-GND-87" (solid, remove dead copper, pour order 31783): -50.065,33.794 -50.06,33.875 -50.048,33.932 -50.024,33.994 -49.998,34.058 -49.974,34.151 -50.17,34.191 -50.366,34.151 -50.326,34.023 -50.31,33.991 -50.279,33.913 -50.265,33.794
FAN_1_TAC on F.Cu "F.Cu-/Fan_Temp/FAN_1_TAC-4" (solid, remove dead copper, pour order 31891): -84.847,81.958 -84.871,81.989 -84.879,82.017 -84.864,82.06 -84.832,82.099 -84.786,82.155 -84.754,82.231 -84.951,82.271 -85.146,82.231 -85.125,82.094 -85.114,82.021 -85.095,81.958 -85.057,81.894 -84.988,81.817
CON_USB4_SSRX_P on F.Cu "F.Cu-/USB2.0&USB3.0/CON_USB4_SSRX_P-1" (solid, remove dead copper, pour order 32051): -112.831,17.007 -112.847,17.121 -112.863,17.188 -112.893,17.323 -112.905,17.462 -113.03,17.446 -113.078,17.133 -113.049,17.128 -113.028,17.115 -113.006,17.073 -113.001,17.013 -113.001,17.007
CON_USB3_SSTX_P on F.Cu "F.Cu-/USB2.0&USB3.0/CON_USB3_SSTX_P-2" (solid, remove dead copper, pour order 32037): -120.521,17.107 -120.521,17.102 -120.53,17.028 -120.553,16.996 -120.598,16.983 -120.55,16.669 -120.425,16.653 -120.413,16.792 -120.383,16.927 -120.361,17.024 -120.351,17.107
TMDS_D0- on F.Cu "F.Cu-/HDMI/TMDS_D0--4" (solid, remove dead copper, pour order 31458): -44.993,17.697 -45.015,17.768 -45.082,18.01 -45.1,18.132 -45.092,18.238 -45.402,18.211 -45.56,17.93 -45.443,17.917 -45.337,17.869 -45.25,17.792 -45.219,17.745 -45.199,17.7 -45.198,17.697
I2C2_SDA on F.Cu "F.Cu-/GPIO/I2C2_SDA-1" (solid, remove dead copper, pour order 32134): -79.325,82.495 -79.325,82.51 -79.321,82.58 -79.306,82.608 -79.275,82.62 -79.4,82.933 -79.525,82.62 -79.504,82.615 -79.489,82.603 -79.475,82.558 -79.475,82.51 -79.475,82.495
GND on F.Cu "F.Cu-GND-86" (solid, remove dead copper, pour order 31676): -117.395,41.93 -117.369,41.932 -117.289,41.931 -117.258,41.915 -117.245,41.88 -116.469,42.03 -117.245,42.18 -117.25,42.157 -117.262,42.141 -117.307,42.127 -117.369,42.128 -117.395,42.13
HSIO_0_TX- on F.Cu "F.Cu-/LattePanda Module/HSIO_0_TX-" (solid, remove dead copper, pour order 31941): -79.157,21.869 -79.319,21.878 -79.418,21.884 -79.559,21.865 -79.521,21.669 -79.409,21.503 -79.337,21.569 -79.308,21.612 -79.284,21.646 -79.256,21.674 -79.216,21.692 -79.157,21.699
GND on F.Cu "F.Cu-GND-85" (solid, remove dead copper, pour order 31810): -104.366,13.08 -104.288,13.075 -104.232,13.063 -104.167,13.037 -104.103,13.009 -104.009,12.984 -103.969,13.18 -104.009,13.376 -104.141,13.335 -104.167,13.323 -104.246,13.293 -104.366,13.28
GND on F.Cu "F.Cu-GND-84" (solid, remove dead copper, pour order 31770): -20.515,39.926 -20.52,39.846 -20.532,39.788 -20.556,39.726 -20.582,39.662 -20.606,39.569 -20.41,39.529 -20.214,39.569 -20.254,39.697 -20.27,39.729 -20.301,39.807 -20.315,39.926
GND on F.Cu "F.Cu-GND-83" (solid, remove dead copper, pour order 31089): 18 vertices, not listed, extent -62.624,11.381 -61.376,12.618
+15V on F.Cu "F.Cu-+15V-3" (solid, remove dead copper, pour order 30972): -8.59,2.955 -8.59,4.965 -7.455,6.1 -6.59,6.1 -6.59,6.45 -6.59,16.52 -3.47,16.49 -3.43,3.02
CON_USB3_D_P on F.Cu "F.Cu-/USB2.0&USB3.0/CON_USB3_D_P-3" (solid, remove dead copper, pour order 31402): -106.191,12.632 -106.218,12.747 -106.275,13.01 -106.291,13.142 -106.29,13.258 -106.585,13.181 -106.744,12.862 -106.624,12.856 -106.514,12.814 -106.422,12.742 -106.389,12.698 -106.367,12.653 -106.361,12.632
Net-(Q4-D) on F.Cu "F.Cu-Net-(Q4-D)-3" (solid, remove dead copper, pour order 31733): -46.289,15.541 -46.311,15.535 -46.334,15.539 -46.384,15.58 -46.438,15.68 -46.448,15.71 -46.685,15.449 -46.4,15.227 -46.371,15.296 -46.29,15.39 -46.152,15.5 -46.083,15.541
GND on F.Cu "F.Cu-GND-82" (solid, remove dead copper, pour order 31767): -11.515,39.926 -11.52,39.846 -11.532,39.788 -11.556,39.726 -11.582,39.662 -11.606,39.569 -11.41,39.529 -11.214,39.569 -11.254,39.697 -11.27,39.729 -11.301,39.807 -11.315,39.926
GND on F.Cu "F.Cu-GND-81" (solid, remove dead copper, pour order 32014): -93.595,24.655 -93.6,24.6 -93.613,24.56 -93.657,24.509 -93.677,24.493 -93.725,24.453 -93.776,24.391 -93.61,24.279 -93.414,24.319 -93.441,24.479 -93.445,24.631 -93.445,24.655
GbE_PCIe_TX- on F.Cu "F.Cu-/Gigabit Ethernet/GbE_PCIe_TX-" (solid, remove dead copper, pour order 31540): -86.125,30.72 -86.207,30.772 -86.251,30.818 -86.289,30.874 -86.32,30.935 -86.341,31.004 -86.35,31.112 -86.631,30.96 -86.667,30.65 -86.56,30.659 -86.4,30.635 -86.188,30.573 -86.125,30.55
HSIO_3_RX+ on F.Cu "F.Cu-/LattePanda Module/HSIO_3_RX+" (solid, remove dead copper, pour order 31479): -115.845,62.709 -116.153,62.688 -116.444,62.663 -116.78,62.66 -116.771,62.51 -115.995,62.454 -115.99,62.482 -115.978,62.503 -115.932,62.53 -115.846,62.539 -115.845,62.539
+3V3 on F.Cu "F.Cu-+3V3-40" (solid, remove dead copper, pour order 31892): -109.06,87.866 -109.065,87.775 -109.077,87.712 -109.094,87.658 -109.136,87.509 -108.94,87.469 -108.744,87.509 -108.783,87.628 -108.808,87.672 -108.844,87.748 -108.856,87.799 -108.86,87.866
Net-(U13-K) on F.Cu "F.Cu-Net-(U13-K)-1" (solid, remove dead copper, pour order 31258): -35.947,0.473 -35.953,0.382 -35.977,0.275 -36.004,0.211 -36.042,0.156 -36.077,0.126 -36.119,0.105 -36.135,0.101 -35.86,-0.566 -35.571,0.08 -35.625,0.119 -35.664,0.195 -35.688,0.318 -35.693,0.466 -35.693,0.473
Net-(J5-VBUS2) on F.Cu "F.Cu-Net-(J5-VBUS2)" (solid, remove dead copper, pour order 31179): 17 vertices, not listed, extent -69.755,13.818 -68.75,14.794
Net-(D10-A2) on F.Cu "F.Cu-Net-(D10-A2)-3" (solid, remove dead copper, pour order 31718): -11.54,3.725 -11.538,3.699 -11.539,3.619 -11.555,3.588 -11.59,3.575 -11.44,2.954 -11.29,3.575 -11.313,3.58 -11.329,3.592 -11.343,3.637 -11.342,3.699 -11.34,3.725
+15V on F.Cu "F.Cu-+15V-2" (solid, remove dead copper, pour order 30952): -12.79,2.955 -12.79,4.93 -13.3,5.44 -16.15,5.44 -16.155,4.73 -15.4,3.78 -13.38,3.76 -13.38,4.23 -13.38,2.95
CON_USB4_D_P on F.Cu "F.Cu-/USB2.0&USB3.0/CON_USB4_D_P-2" (solid, remove dead copper, pour order 31964): -82.807,19.049 -82.969,19.058 -83.068,19.064 -83.209,19.045 -83.171,18.849 -83.059,18.683 -82.987,18.749 -82.958,18.792 -82.934,18.826 -82.906,18.854 -82.866,18.872 -82.807,18.879
{\P\L\T\_\R\S\T\}\ on F.Cu "F.Cu-/~{PLT_RST}-4" (solid, remove dead copper, pour order 31869): -110.989,40.991 -111.041,41.049 -111.072,41.098 -111.099,41.162 -111.125,41.226 -111.174,41.311 -111.341,41.201 -111.451,41.034 -111.329,40.969 -111.302,40.959 -111.224,40.925 -111.131,40.849
TMDS_CK+ on F.Cu "F.Cu-/HDMI/TMDS_CK+-3" (solid, remove dead copper, pour order 32097): -45.587,10.448 -45.592,10.48 -45.6,10.541 -45.59,10.564 -45.565,10.572 -45.69,10.886 -45.815,10.572 -45.795,10.568 -45.784,10.555 -45.781,10.513 -45.788,10.48 -45.793,10.448
I2C3_SCL on F.Cu "F.Cu-/GPIO/I2C3_SCL-3" (solid, remove dead copper, pour order 31979): -58.762,76.418 -58.803,76.466 -58.828,76.509 -58.851,76.598 -58.866,76.675 -58.914,76.771 -59.081,76.661 -59.191,76.494 -59.072,76.431 -59.039,76.42 -58.962,76.387 -58.868,76.312
GND on F.Cu "F.Cu-GND-80" (solid, remove dead copper, pour order 31452): -12.186,16.862 -12.17,16.862 -12.119,16.863 -12.065,16.852 -12.014,16.818 -11.977,16.75 -11.739,17.011 -11.977,17.27 -12.012,17.221 -12.087,17.183 -12.221,17.156 -12.429,17.145 -12.468,17.144
PCIE30_TX0_P on F.Cu "F.Cu-/PCIe x4/PCIE30_TX0_P-1" (solid, remove dead copper, pour order 31198): 20 vertices, not listed, extent -138.001,37.593 -136.979,38.589
Net-(U15-BOOST) on F.Cu "F.Cu-Net-(U15-BOOST)" (solid, remove dead copper, pour order 31316): 17 vertices, not listed, extent -22.218,17.553 -21.47,18.116
GND on F.Cu "F.Cu-GND-79" (solid, remove dead copper, pour order 31657): -117.395,34.43 -117.369,34.432 -117.289,34.431 -117.258,34.415 -117.245,34.38 -116.469,34.53 -117.245,34.68 -117.25,34.657 -117.262,34.641 -117.307,34.627 -117.369,34.628 -117.395,34.63
TMDS_CK+ on F.Cu "F.Cu-/HDMI/TMDS_CK+-2" (solid, remove dead copper, pour order 31322): -45.533,8.255 -45.531,8.227 -45.531,8.148 -45.546,8.117 -45.58,8.105 -45.43,6.804 -45.28,8.105 -45.303,8.11 -45.319,8.122 -45.332,8.167 -45.329,8.227 -45.327,8.255
+1V0 on F.Cu "F.Cu-+1V0-7" (solid, remove dead copper, pour order 32017): -93.46,33.018 -93.465,33.091 -93.477,33.145 -93.504,33.207 -93.533,33.27 -93.559,33.362 -93.755,33.324 -93.866,33.157 -93.789,33.124 -93.721,33.114 -93.677,33.109 -93.642,33.096 -93.618,33.068 -93.61,33.018
GND on F.Cu "F.Cu-GND-78" (solid, remove dead copper, pour order 31708): -90.509,24.375 -90.54,24.444 -90.544,24.489 -90.535,24.535 -90.517,24.566 -90.487,24.593 -90.436,24.616 -90.736,24.811 -90.935,24.536 -90.872,24.516 -90.779,24.447 -90.654,24.315 -90.615,24.269
+3V3 on F.Cu "F.Cu-+3V3-39" (solid, remove dead copper, pour order 31270): -52.92,19.407 -52.915,19.483 -52.897,19.574 -52.87,19.651 -52.832,19.721 -52.797,19.761 -52.755,19.791 -52.731,19.8 -53.02,20.446 -53.309,19.8 -53.241,19.759 -53.184,19.681 -53.14,19.561 -53.12,19.407
Net-(M1-PWM) on F.Cu "F.Cu-Net-(M1-PWM)" (solid, remove dead copper, pour order 31424): -81.062,74.791 -81.001,74.722 -80.938,74.631 -80.898,74.553 -80.872,74.472 -80.865,74.414 -80.87,74.358 -80.549,74.419 -80.438,74.69 -80.549,74.702 -80.679,74.754 -80.824,74.848 -80.921,74.932
CON_USB3_D_P on F.Cu "F.Cu-/USB2.0&USB3.0/CON_USB3_D_P-2" (solid, remove dead copper, pour order 31966): -84.117,17.769 -84.279,17.778 -84.378,17.784 -84.519,17.765 -84.481,17.569 -84.369,17.403 -84.297,17.469 -84.268,17.512 -84.244,17.546 -84.216,17.574 -84.176,17.592 -84.117,17.599
GND on F.Cu "F.Cu-GND-77" (solid, remove dead copper, pour order 31675): -117.395,40.43 -117.369,40.432 -117.289,40.431 -117.258,40.415 -117.245,40.38 -116.469,40.53 -117.245,40.68 -117.25,40.657 -117.262,40.641 -117.307,40.627 -117.369,40.628 -117.395,40.63
HSIO_2_TX+ on F.Cu "F.Cu-/LattePanda Module/HSIO_2_TX+-2" (solid, remove dead copper, pour order 31963): -101.103,44.031 -100.941,44.022 -100.842,44.016 -100.701,44.035 -100.739,44.231 -100.851,44.397 -100.923,44.331 -100.952,44.288 -100.976,44.254 -101.004,44.226 -101.044,44.208 -101.103,44.201
HSIO_2_TX+ on F.Cu "F.Cu-/LattePanda Module/HSIO_2_TX+-1" (solid, remove dead copper, pour order 31552): -104.839,44.201 -104.921,44.257 -104.964,44.305 -105.002,44.363 -105.032,44.427 -105.052,44.497 -105.06,44.599 -105.341,44.45 -105.381,44.14 -105.274,44.148 -105.116,44.124 -104.911,44.06 -104.839,44.031
{\R\S\T\_\S\W\}\ on F.Cu "F.Cu-/LattePanda Module/~{RST_SW}" (solid, remove dead copper, pour order 32011): -71.59,34.424 -71.585,34.497 -71.571,34.547 -71.519,34.621 -71.454,34.707 -71.621,34.819 -71.817,34.779 -71.775,34.63 -71.75,34.548 -71.74,34.424
GND on F.Cu "F.Cu-GND-76" (solid, remove dead copper, pour order 31774): -45.015,39.926 -45.02,39.846 -45.032,39.788 -45.056,39.726 -45.082,39.662 -45.106,39.569 -44.91,39.529 -44.714,39.569 -44.754,39.697 -44.77,39.729 -44.801,39.807 -44.815,39.926
CON_USB4_SSTX_N on F.Cu "F.Cu-/USB2.0&USB3.0/CON_USB4_SSTX_N-1" (solid, remove dead copper, pour order 32029): -118.579,17.007 -118.579,17.013 -118.57,17.087 -118.547,17.119 -118.502,17.133 -118.55,17.446 -118.675,17.462 -118.687,17.323 -118.717,17.188 -118.739,17.091 -118.749,17.007
+5V on F.Cu "F.Cu-+5V-8" (solid, remove dead copper, pour order 31374): -88.28,81.28 -88.36,81.275 -88.456,81.268 -88.554,81.272 -88.64,81.298 -88.674,81.324 -88.7,81.36 -88.871,81.08 -88.7,80.8 -88.653,80.854 -88.577,80.884 -88.462,80.892 -88.36,80.885 -88.28,80.88
GND on F.Cu "F.Cu-GND-75" (solid, remove dead copper, pour order 32010): -52.39,17.431 -52.395,17.5 -52.407,17.55 -52.441,17.62 -52.475,17.683 -52.504,17.779 -52.7,17.741 -52.811,17.574 -52.733,17.54 -52.69,17.53 -52.65,17.522 -52.618,17.507 -52.597,17.479 -52.59,17.431
GND on F.Cu "F.Cu-GND-74" (solid, remove dead copper, pour order 31781): -27.815,41.994 -27.81,42.075 -27.798,42.132 -27.774,42.194 -27.748,42.258 -27.724,42.351 -27.92,42.391 -28.116,42.351 -28.076,42.223 -28.06,42.191 -28.029,42.113 -28.015,41.994
HSIO_3_RX- on F.Cu "F.Cu-/LattePanda Module/HSIO_3_RX--1" (solid, remove dead copper, pour order 31488): -115.845,62.981 -115.846,62.981 -115.887,62.983 -115.937,62.992 -115.978,63.017 -115.99,63.038 -115.995,63.066 -116.771,63.01 -116.78,62.86 -116.463,62.858 -116.153,62.832 -115.845,62.811
SOC_UART1_TX on F.Cu "F.Cu-/GPIO/SOC_UART1_TX-1" (solid, remove dead copper, pour order 31068): 23 vertices, not listed, extent -97.506,89.754 -96.344,90.916
HSI+ on F.Cu "F.Cu-/Gigabit Ethernet/HSI+" (solid, remove dead copper, pour order 32070): -90.488,29.889 -90.659,29.867 -90.816,29.843 -90.992,29.84 -90.986,29.74 -90.585,29.69 -90.581,29.711 -90.569,29.722 -90.529,29.724 -90.51,29.721 -90.488,29.719
{\P\L\T\_\R\S\T\}\ on F.Cu "F.Cu-/~{PLT_RST}-3" (solid, remove dead copper, pour order 31685): -109.845,40.18 -109.819,40.182 -109.739,40.181 -109.708,40.165 -109.695,40.13 -108.919,40.28 -109.695,40.43 -109.7,40.407 -109.712,40.391 -109.757,40.377 -109.819,40.378 -109.845,40.38
Net-(U14-VDD) on F.Cu "F.Cu-Net-(U14-VDD)-1" (solid, remove dead copper, pour order 31504): -13.36,8.315 -13.271,8.312 -13.164,8.296 -13.112,8.28 -13.066,8.256 -13.03,8.223 -13.007,8.18 -12.769,8.44 -13.007,8.7 -13.045,8.641 -13.116,8.598 -13.228,8.572 -13.36,8.565
CON_USB4_SSTX_P on F.Cu "F.Cu-/USB2.0&USB3.0/CON_USB4_SSTX_P-1" (solid, remove dead copper, pour order 32047): -118.851,17.007 -118.867,17.121 -118.883,17.188 -118.913,17.323 -118.925,17.462 -119.05,17.446 -119.098,17.133 -119.069,17.128 -119.048,17.115 -119.026,17.073 -119.021,17.013 -119.021,17.007
CON_USB2_D_P on F.Cu "F.Cu-/USB2.0&USB3.0/CON_USB2_D_P-2" (solid, remove dead copper, pour order 32066): -65.449,15.893 -65.433,15.779 -65.417,15.712 -65.387,15.577 -65.375,15.438 -65.25,15.454 -65.202,15.767 -65.231,15.772 -65.252,15.785 -65.274,15.827 -65.279,15.887 -65.279,15.893
TMDS_D0- on F.Cu "F.Cu-/HDMI/TMDS_D0--3" (solid, remove dead copper, pour order 31419): -45.316,14.944 -45.397,14.872 -45.501,14.797 -45.587,14.749 -45.677,14.715 -45.737,14.702 -45.797,14.7 -45.686,14.429 -45.365,14.368 -45.367,14.46 -45.332,14.571 -45.256,14.699 -45.171,14.799
TMDS_CK- on F.Cu "F.Cu-/HDMI/TMDS_CK--2" (solid, remove dead copper, pour order 32104): -46.087,9.673 -46.092,9.705 -46.1,9.766 -46.09,9.789 -46.065,9.797 -46.19,10.111 -46.315,9.797 -46.295,9.793 -46.284,9.78 -46.281,9.738 -46.288,9.705 -46.293,9.673
GND on F.Cu "F.Cu-GND-73" (solid, remove dead copper, pour order 31755): -25.015,39.926 -25.02,39.846 -25.032,39.788 -25.056,39.726 -25.082,39.662 -25.106,39.569 -24.91,39.529 -24.714,39.569 -24.754,39.697 -24.77,39.729 -24.801,39.807 -24.815,39.926
GND on F.Cu "F.Cu-GND-72" (solid, remove dead copper, pour order 31768): -38.515,39.926 -38.52,39.846 -38.532,39.788 -38.556,39.726 -38.582,39.662 -38.606,39.569 -38.41,39.529 -38.214,39.569 -38.254,39.697 -38.27,39.729 -38.301,39.807 -38.315,39.926
CON_USB3_SSTX_P on F.Cu "F.Cu-/USB2.0&USB3.0/CON_USB3_SSTX_P-1" (solid, remove dead copper, pour order 32038): -120.521,17.882 -120.521,17.877 -120.53,17.803 -120.553,17.771 -120.598,17.758 -120.55,17.444 -120.425,17.428 -120.413,17.567 -120.383,17.702 -120.361,17.799 -120.351,17.882
CON_USB3_SSRX_N on F.Cu "F.Cu-/USB2.0&USB3.0/CON_USB3_SSRX_N-1" (solid, remove dead copper, pour order 32061): -114.229,17.882 -114.213,17.769 -114.197,17.702 -114.167,17.567 -114.155,17.428 -114.03,17.444 -113.982,17.758 -114.011,17.762 -114.032,17.775 -114.054,17.817 -114.059,17.877 -114.059,17.882
HPD on F.Cu "F.Cu-/HDMI/HPD-2" (solid, remove dead copper, pour order 31561): -53.068,15.745 -53.106,15.791 -53.142,15.853 -53.163,15.911 -53.172,15.974 -53.166,16.022 -53.149,16.069 -53.12,16.112 -53.441,16.118 -53.591,15.847 -53.523,15.829 -53.434,15.767 -53.303,15.631 -53.245,15.568
+3V3 on F.Cu "F.Cu-+3V3-38" (solid, remove dead copper, pour order 31656): -107.995,31.88 -108.021,31.878 -108.101,31.879 -108.132,31.895 -108.145,31.93 -108.921,31.78 -108.145,31.63 -108.14,31.653 -108.128,31.669 -108.083,31.683 -108.021,31.682 -107.995,31.68
CON_USB4_D_N on F.Cu "F.Cu-/USB2.0&USB3.0/CON_USB4_D_N-4" (solid, remove dead copper, pour order 31961): -115.903,17.185 -115.741,17.176 -115.642,17.17 -115.501,17.188 -115.539,17.385 -115.651,17.551 -115.723,17.484 -115.752,17.442 -115.776,17.407 -115.804,17.38 -115.844,17.362 -115.903,17.355
SUSCLK_WIFI on F.Cu "F.Cu-/LattePanda Module/SUSCLK_WIFI-5" (solid, remove dead copper, pour order 31814): -81.546,48.51 -81.468,48.505 -81.412,48.493 -81.347,48.467 -81.283,48.439 -81.189,48.414 -81.149,48.61 -81.189,48.806 -81.321,48.765 -81.347,48.753 -81.426,48.723 -81.546,48.71
TMDS_D1- on F.Cu "F.Cu-/HDMI/TMDS_D1--3" (solid, remove dead copper, pour order 31457): -42.486,17.697 -42.508,17.768 -42.575,18.01 -42.593,18.132 -42.585,18.238 -42.895,18.211 -43.053,17.93 -42.936,17.917 -42.83,17.869 -42.743,17.792 -42.712,17.745 -42.692,17.7 -42.691,17.697
FAN_1_TAC on F.Cu "F.Cu-/Fan_Temp/FAN_1_TAC-3" (solid, remove dead copper, pour order 31381): -88.41,82.87 -88.327,82.877 -88.236,82.885 -88.143,82.882 -88.062,82.858 -88.029,82.834 -88.005,82.8 -87.819,83.07 -88.005,83.34 -88.051,83.288 -88.125,83.26 -88.239,83.256 -88.327,83.263 -88.41,83.27
PCIE30_TX2_N on F.Cu "F.Cu-/PCIe x4/PCIE30_TX2_N" (solid, remove dead copper, pour order 31702): -126.668,28.857 -126.633,28.815 -126.603,28.762 -126.58,28.7 -126.564,28.627 -126.56,28.474 -126.279,28.589 -126.194,28.9 -126.272,28.891 -126.343,28.892 -126.406,28.903 -126.462,28.921 -126.509,28.947 -126.547,28.978
TMDS_D1+ on F.Cu "F.Cu-/HDMI/TMDS_D1+-3" (solid, remove dead copper, pour order 31438): -42.017,13.902 -41.908,14.001 -41.764,14.1 -41.688,14.135 -41.612,14.156 -41.564,14.16 -41.684,14.431 -42.005,14.477 -41.993,14.385 -42.016,14.277 -42.078,14.154 -42.163,14.048
HPD on F.Cu "F.Cu-/HDMI/HPD-1" (solid, remove dead copper, pour order 31727): -52.768,15.829 -52.839,15.764 -52.895,15.726 -52.941,15.702 -53.071,15.626 -52.961,15.459 -52.794,15.349 -52.718,15.479 -52.674,15.556 -52.591,15.652
TMDS_D0+ on F.Cu "F.Cu-/HDMI/TMDS_D0+-4" (solid, remove dead copper, pour order 31324): -44.033,8.255 -44.031,8.227 -44.031,8.148 -44.046,8.117 -44.08,8.105 -43.93,6.804 -43.78,8.105 -43.803,8.11 -43.819,8.122 -43.832,8.167 -43.829,8.227 -43.827,8.255